# Altium PCB Rackmount_DSP.PcbDoc (part 22 of 24)
Units mil, origin at the board's own origin, x right, y up, seen from the top; angles counter-clockwise.
Board outline 10629.92 x 8267.72 mil, 4 copper layers (Top Layer, Mid Layer 1, Mid Layer 2, Bottom Layer), stack 36.2 mil thick; 4500 components, 1565 nets, 9765 pads, 3289 vias.
Unrouted connection lines stored in the file: 1.
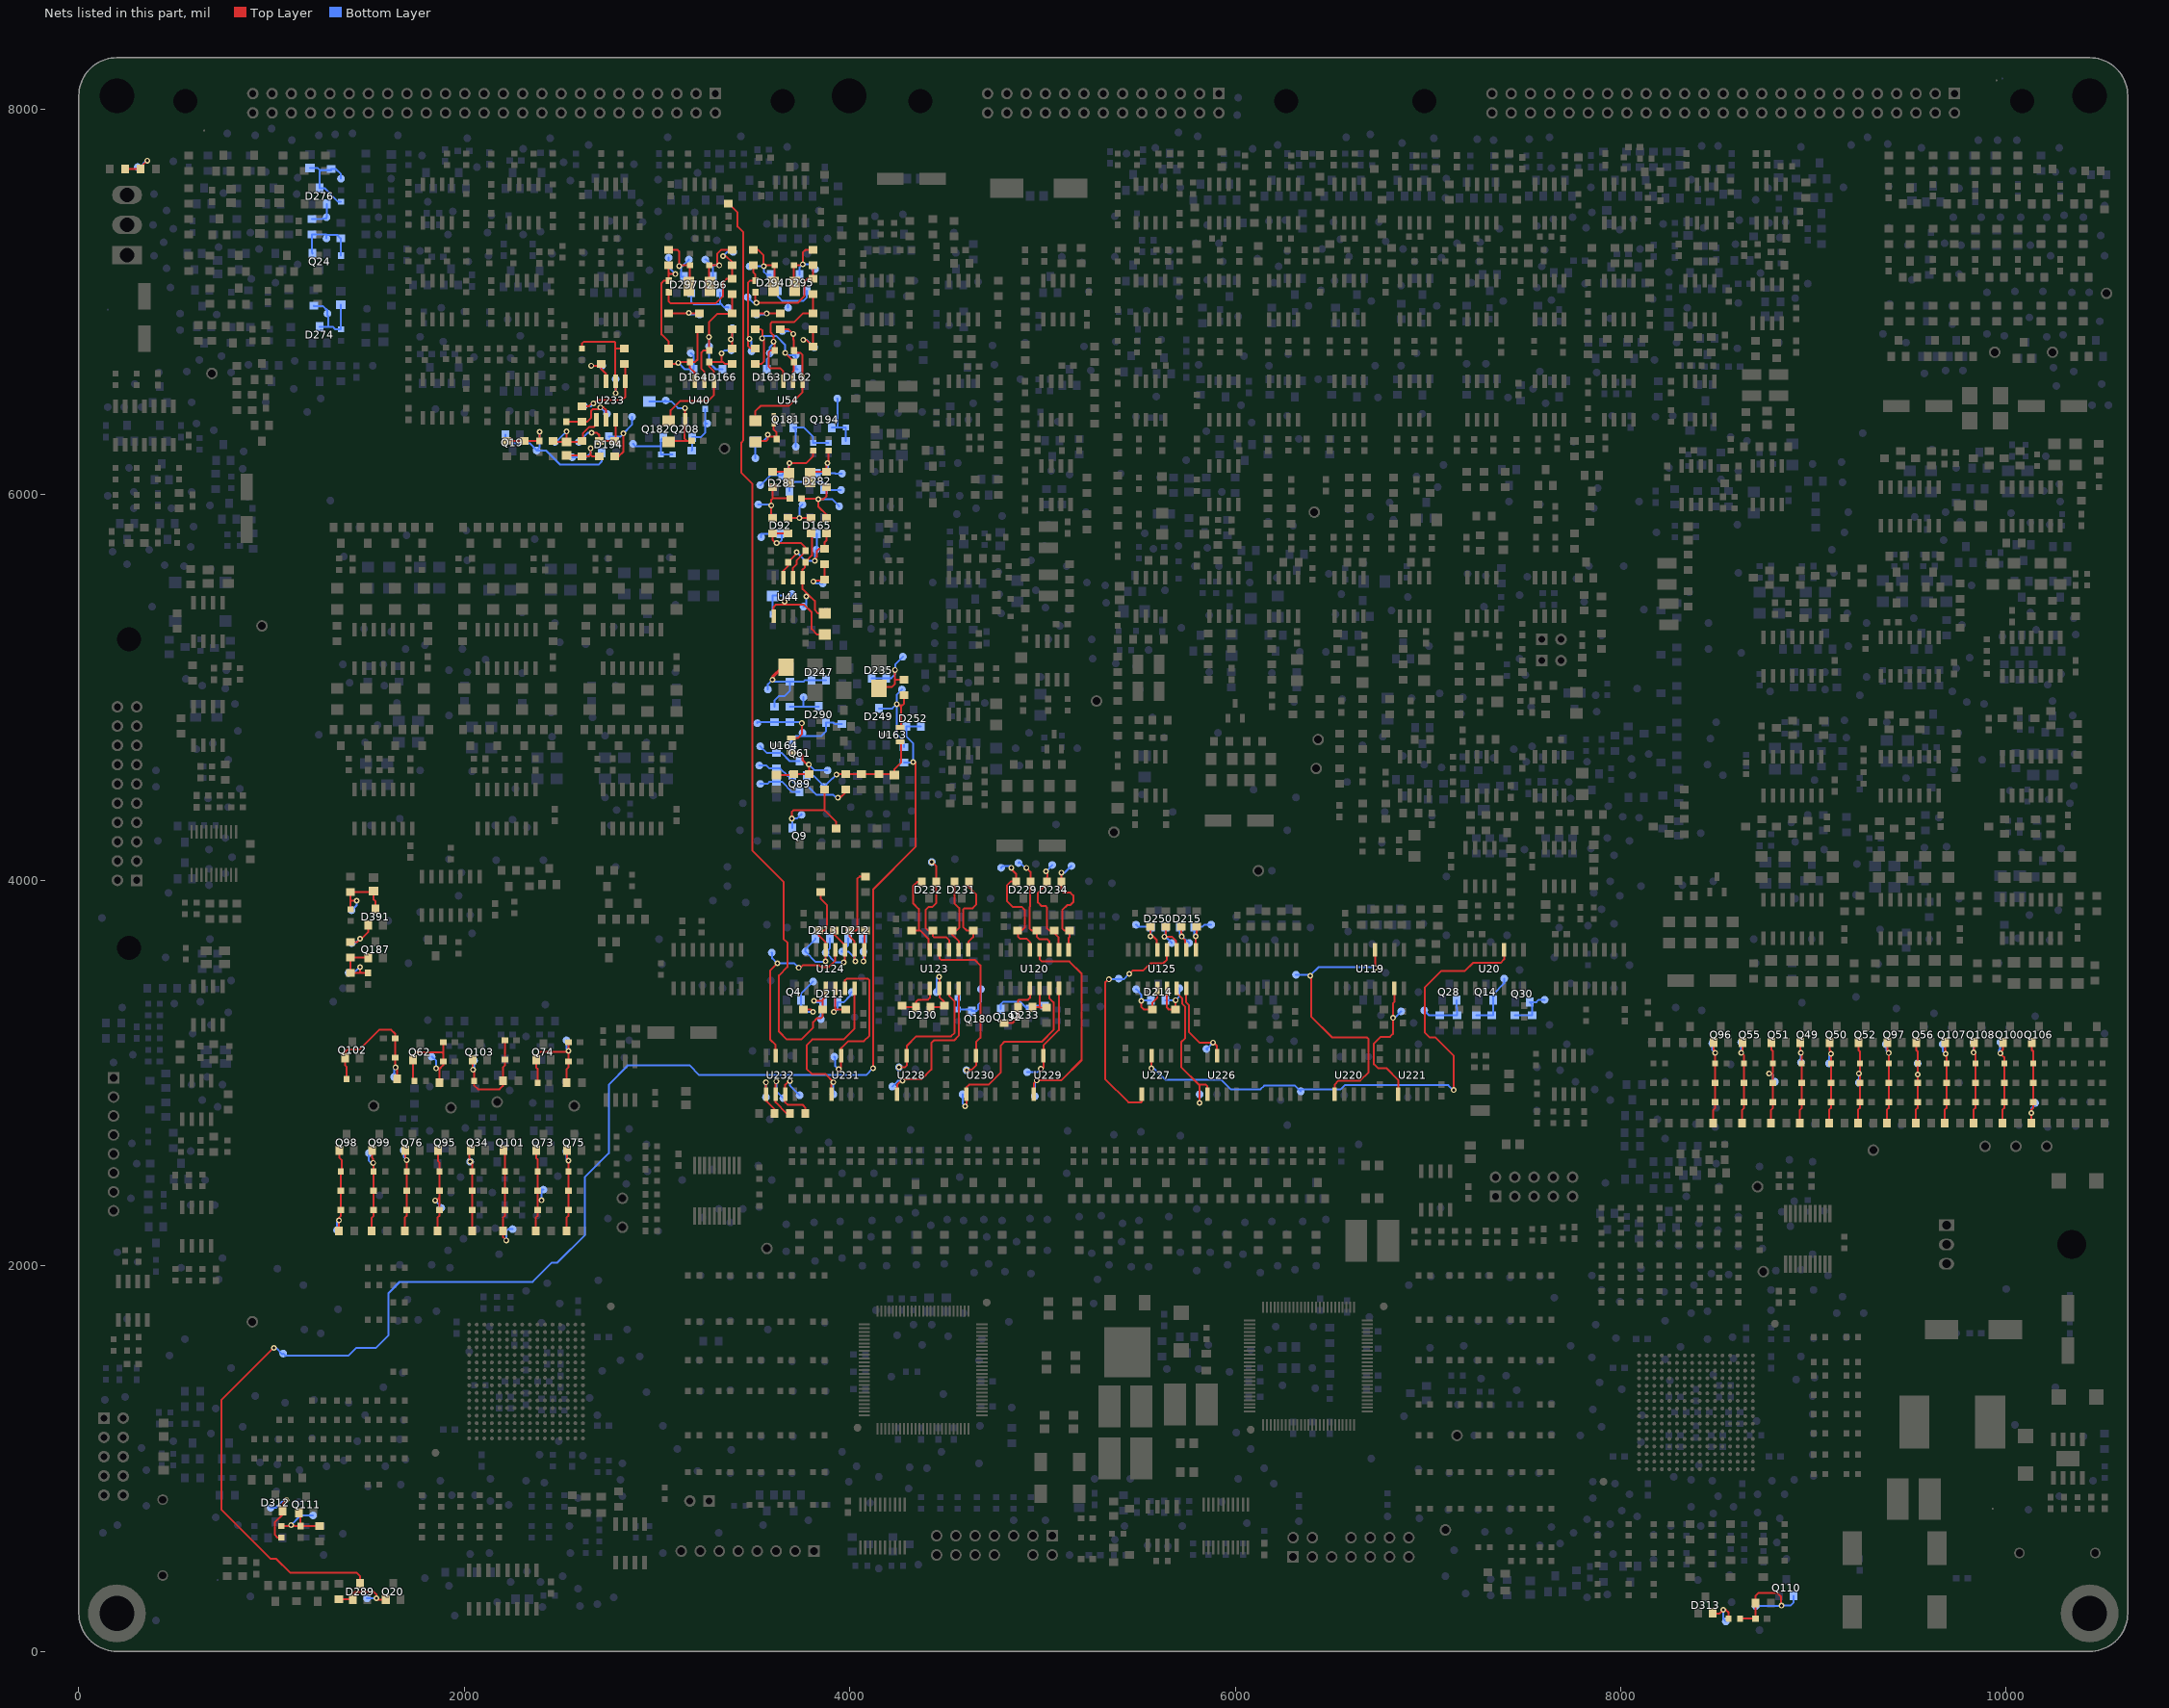
[diagram p24: the nets of this part, all layers, seen from the top]

## Via types
v1: diameter 30, hole 16, Top Layer to Bottom Layer, 3143 vias
v2: diameter 22, hole 12, Top Layer to Bottom Layer, 146 vias

## Nets (pads, with @x,y where several pads share a name; then routed paths per layer and width w, separated by ;. In a path a pad name is that pad's centre, name@x,y a point inside that pad or via, vN(x,y) a via of type N, cw(c..) or ccw(c..) an arc to the next point about the centre after c; other vN are vias at no path point) (continued)
XSIG290101: C820.1 D274.3 R1168.2 R2109.2 TP194.1 | length 407.7
  Bottom Layer w10: R1168.2@1220,6980 1220,6978.12 1267.37,6978.12 1289.15,6956.33 1289.15,6940 TP194.1@1290,6940 1290,6931.11 1295.27,6925.84 1295.27,6871.5 ; D274.3@1250,6871.5 1295.27,6871.5 ; C820.1@1360,6985 R2109.2@1360,6860 1329,6860 1317.5,6871.5 1295.27,6871.5
XSIG290105: C420.2 Q24.1 R1238.1 R1376.1 TP193.1 | length 369.4
  Bottom Layer w10: Q24.1@1212.5,7251.5 1212.5,7255 1208.39,7259.11 1208.39,7350 R1238.1@1210,7350 1285,7350 TP193.1@1285,7348.25 ; TP193.1@1285,7330 TP193.1@1285,7348.25 ; C420.2@1360,7240 R1376.1@1360,7330 1357.5,7330 1339.25,7348.25 TP193.1@1285,7348.25
XSIG290110: D276.1 R1238.2 TP1374.1 | length 153.1
  Bottom Layer w10: R1238.2@1210,7430 1261.52,7430 1264.02,7432.5 1285,7432.5 TP1374.1@1285,7440 1287.5,7442.5 D276.1@1287.5,7508.5
XSIG290111: C821.1 D276.3 R1169.2 R2110.2 TP192.1 | length 440.7
  Bottom Layer w10: C821.1@1200,7695 1200,7694.49 1240,7694.49 1250,7684.49 1257.07,7684.49 1257.07,7684.19 ; R2110.2@1360,7520 1345.47,7520 1273.97,7591.5 D276.3@1250,7591.5 1250,7676.97 1257.07,7684.04 1257.07,7684.19 ; TP192.1@1360,7640 1360,7663.94 1333.94,7690 R1169.2@1310,7690 1310,7684.19 1257.07,7684.19
XSIG290156: TP1375.1 U119.15 U221.5 | length 756.6
  Top Layer w10: U119.15@6825,3440 6825,3368.92 6817.74,3361.66 v1(6817.74,3286.25) 6817.74,3203.56 6802.93,3188.75 6754.04,3188.75 6719,3153.71 6719,3046.29 6739.81,3025.47 6783.54,3025.47 6845,2964.01 U221.5@6845,2890
  Bottom Layer w10: v1(6817.74,3286.25) 6826.25,3286.25 TP1375.1@6860,3320
XSIG290160: TP189.1 U119.4 U220.5 | length 1519.7
  Top Layer w10: v1(6388.69,3505.02) 6392.89,3505.02 6392.89,3293.72 6501.6,3185.02 6682.76,3185.02 6691.5,3176.28 6691.5,3004.17 6647.84,2960.51 6535.51,2960.51 6515,2940 U220.5@6515,2890 ; U119.4@6725,3640 6725,3575.59 6725.09,3575.5 v1(6725.09,3545.5)
  Bottom Layer w10: TP189.1@6315,3510 6388.69,3510 v1(6388.69,3505.02) 6433.87,3550.2 6722.89,3550.2 6725.09,3548 v1(6725.09,3545.5)
XSIG290170: C1119.2 Q187.1 R2545.1 R2554.1 TP1837.1 | length 365.9
  Top Layer w10: v1(1458.78,3550.26) 1458.78,3525.26 1461.61,3522.43 1461.61,3520 ; C1119.2@1500,3520 1461.61,3520 ; Q187.1@1502.5,3598.5 1500.65,3598.5 1499.15,3600 R2545.1@1410,3600 R2554.1@1410,3520 1461.61,3520
  Bottom Layer w10: TP1837.1@1400,3520 1428.51,3520 v1(1458.78,3550.26)
XSIG290175: D391.1 R2545.2 TP1836.1 | length 205.2
  Top Layer w10: R2545.2@1410,3680 1410,3679.31 1442.4,3679.31 1459.01,3695.92 v1(1459.01,3697.7) 1466.82,3697.7 1502.5,3733.38 D391.1@1502.5,3768.5
  Bottom Layer w10: TP1836.1@1415,3675 1436.3,3675 v1(1459.01,3697.7)
XSIG290176: C1137.1 D391.3 R2534.2 R2540.2 TP1835.1 | length 401.6
  Top Layer w10: R2534.2@1410,3850 1410,3897.98 ; v1(1441.87,3894.53) 1413.44,3894.53 1410,3897.98 ; C1137.1@1530,3945 C1137.1@1530,3940 ; D391.3@1540,3851.5 1540,3890 1530,3900 C1137.1@1530,3940 ; 1410,3897.98 R2540.2@1410,3940 C1137.1@1530,3940
  Bottom Layer w10: TP1835.1@1415,3845 1441.87,3871.87 v1(1441.87,3894.53)
XSIG300001: D250.1 R1161.2 TP1376.1 U125.3 | length 275.3
  Top Layer w10: v1(5632.2,3707.77) v1@5640,3707.77 ; R1161.2@5640,3760 v1@5640,3707.77 ; U125.3@5695,3640 5691.71,3640 5691.71,3687.71 5671.65,3707.77 v1@5640,3707.77
  Bottom Layer w10: D250.1@5637.5,3758.5 5637.5,3720 5632.2,3714.7 v1(5632.2,3707.77) 5637.23,3707.77 TP1376.1@5670,3675
XSIG300002: D250.2 R1157.2 TP1377.1 U125.5 | length 275.2
  Top Layer w10: R1157.2@5560,3760 v1(5560,3709.9) 5572.32,3709.9 5592.21,3690 5592.21,3640 U125.5@5595,3640
  Bottom Layer w10: TP1377.1@5485,3770 5496.5,3758.5 D250.2@5562.5,3758.5 5562.5,3720 5560,3717.5 v1(5560,3709.9)
XSIG300003: D215.1 R1222.2 TP1378.1 U125.1 | length 266.8
  Top Layer w10: U125.1@5795,3640 v1(5795,3709.19) 5795,3720 5800,3725 R1222.2@5800,3760
  Bottom Layer w10: v1(5795,3709.19) 5787.5,3716.69 D215.1@5787.5,3758.5 5828.5,3758.5 5840,3770 TP1378.1@5875,3770
XSIG300004: D215.2 R1172.2 TP1379.1 U125.2 | length 240.2
  Top Layer w10: R1172.2@5720,3760 5720,3725 5721.71,3723.29 v1(5721.71,3708.48) 5738.5,3691.69 5738.5,3640 U125.2@5745,3640
  Bottom Layer w10: D215.2@5712.5,3758.5 5712.5,3717.69 v1(5721.71,3708.48) 5726.52,3708.48 TP1379.1@5760,3675
XSIG300005: D214.1 R1221.2 TP1380.1 U125.13 | length 320.7
  Top Layer w10: U125.13@5645,3440 5645,3339.74 5654.74,3330 R1221.2@5690,3330 5690,3377.83 v1(5690.62,3378.45)
  Bottom Layer w10: D214.1@5637.5,3378.5 v1(5690.62,3378.45) v1(5690.62,3378.45) 5710,3397.83 TP1380.1@5710,3440
XSIG300006: D214.2 R1171.2 TP1381.1 U125.12 | length 338.6
  Top Layer w10: v1(5511.65,3374.2) 5511.65,3344.2 5525.85,3330 R1171.2@5570,3330 5570,3365 5595,3390 U125.12@5595,3440
  Bottom Layer w10: TP1381.1@5485,3435 5511.65,3408.35 v1@5511.65,3381.64 ; v1(5511.65,3374.2) v1@5511.65,3381.64 ; D214.2@5562.5,3378.5 5514.79,3378.5 v1@5511.65,3381.64
XSIG300016: TP182.1 U125.4 U227.5 | length 1206.1
  Top Layer w10: v1(5344.17,3486.07) 5340.82,3486.07 5324.37,3469.62 5324.37,2969.86 5446.07,2848.16 5511.45,2848.16 5515,2851.71 U227.5@5515,2890 ; v1(5449.32,3514.92) 5466.4,3532 5521.93,3532 5560.2,3570.27 5627.19,3570.27 5645,3588.08 U125.4@5645,3640
  Bottom Layer w10: v1(5344.17,3486.07) TP182.1@5395,3486.07 ; TP182.1@5395,3490 TP182.1@5395,3486.07 ; v1(5449.32,3514.92) 5420.47,3486.07 TP182.1@5395,3486.07
XSIG300037: TP181.1 U20.3 U227.3 | length 2863.4
  Top Layer w10: v1(5565,3024.15) U227.3@5565,3090 ; v1(7132.75,2911.95) 7132.75,3090.91 7039.32,3184.33 7008.68,3184.33 6982.25,3210.76 6982.25,3442.87 7069.39,3530 7191.63,3530 7233.04,3571.41 7376.41,3571.41 7395,3590 U20.3@7395,3640
  Bottom Layer w10: v1(5565,3024.15) 5577.29,3024.15 5637.38,2964.07 5927.47,2964.07 5976.07,2915.48 6130.84,2915.48 6150.36,2935 6310,2935 TP181.1@6340,2905 6340,2914.17 6544.67,2914.17 6567.89,2937.39 7104.73,2937.39 7130.17,2911.95 v1(7132.75,2911.95)
XSIG300042: D232.1 R1204.2 TP1925.1 U123.3 | length 606.2
  Top Layer w10: v1(4425,4095) 4425.61,4095 4425.61,4097.18 4447.5,4075.28 D232.1@4447.5,3991.5 4447.5,3881.29 4428.71,3862.5 4408.79,3862.5 4392.5,3846.21 4392.5,3752.21 4404.71,3740 R1204.2@4430,3740 4430,3711.5 4436.52,3704.98 4500.02,3704.98 4515,3690 U123.3@4515,3640
XSIG300044: D232.2 R1205.2 U123.5 | length 463.8
  Top Layer w10: R1205.2@4320,3740 4357.5,3740 ; D232.2@4372.5,3991.5 4348.89,3991.5 4329.33,3971.94 4329.33,3879.24 4357.5,3851.07 4357.5,3740 ; U123.5@4415,3640 4408.5,3640 4408.5,3695.48 4363.98,3740 4357.5,3740
XSIG300046: D231.1 R1202.2 U123.1 | length 473.1
  Top Layer w10: U123.1@4615,3640 4615,3680.2 4639.8,3705 4640,3705 R1202.2@4640,3740 4605.64,3740 4587.83,3757.81 4587.83,3847.97 4594.9,3855.04 4636.94,3855.04 4656.65,3874.76 4656.65,3925.97 4617.5,3965.12 D231.1@4617.5,3991.5
XSIG300048: D231.2 R1203.2 U123.2 | length 410.1
  Top Layer w10: D231.2@4542.5,3991.5 4542.5,3880.81 4567.5,3855.81 4567.5,3753.39 4554.11,3740 R1203.2@4530,3740 4528.36,3740 4528.36,3721.1 4566.24,3683.23 4566.23,3640 U123.2@4565,3640
XSIG300050: D230.1 R1200.2 TP1666.1 U123.13 | length 348
  Top Layer w10: D230.1@4417.5,3341.5 4467.73,3341.5 4476.23,3350 R1200.2@4488.35,3350 ; v1(4463.61,3500.22) 4465,3500.22 U123.13@4465,3440 4465,3393.82 4488.35,3370.46 R1200.2@4488.35,3350 ; R1200.2@4490,3350 R1200.2@4488.35,3350
  Bottom Layer w10: TP1666.1@4450,3420 4450,3493.81 4466.66,3510.47 4466.66,3500.22 v1(4463.61,3500.22)
XSIG300052: D230.2 R1201.2 U123.12 | length 239.5
  Top Layer w10: R1201.2@4270,3350 4270,3341.5 D230.2@4342.5,3341.5 4342.5,3368.73 4353.77,3380 4405,3380 4415,3390 U123.12@4415,3440
XSIG300066: TP1388.1 U123.15 U228.5 | length 868.5
  Top Layer w10: U228.5@4245,2890 4245,2940 4264.69,2959.69 v1(4273.48,2959.69) 4276.5,2959.69 4285.29,2968.48 4373.56,2968.48 4423.05,3017.97 4423.05,3156.45 4436.62,3170.02 4541.25,3170.02 4565.22,3193.99 4565.22,3440 U123.15@4565,3440
  Bottom Layer w10: TP1388.1@4220,2930 4249.69,2959.69 v1(4273.48,2959.69)
XSIG300071: Q4.1 R1272.2 TP1389.1 | length 280.3
  Top Layer w10: R1272.2@3760,3330 3797.5,3330 3808.78,3318.72 v1(3808.78,3317.07)
  Bottom Layer w10: v1(3808.78,3317.07) 3781.48,3317.07 3747.5,3351.04 Q4.1@3747.5,3378.5 3747.5,3412.5 TP1389.1@3810,3475
XSIG300078: TP1390.1 U123.4 U230.3 | length 860.2
  Top Layer w10: U123.4@4465,3640 4465,3595.71 4472.76,3587.95 4648.06,3587.95 4677.3,3558.7 4677.3,3182.72 4655,3160.42 U230.3@4655,3090 4655,3040 4631.44,3016.44 4606.44,3016.44 v1(4605,3015)
XSIG300089: TP1391.1 U123.14 U228.3 | length 664.6
  Top Layer w10: v1(4255,3030) 4285,3030 4295,3040 U228.3@4295,3090 4295,3140 4345.23,3190.23 4524.86,3190.23 4544.16,3209.53 4544.16,3371.13 4515,3400.28 U123.14@4515,3440
XSIG300090: D229.1 R1189.2 TP1791.1 U120.3 | length 574.7
  Top Layer w10: v1(4916.48,4064.87) 4937.5,4043.85 D229.1@4937.5,3991.5 4935.88,3991.5 4935.88,3864.63 4932.5,3861.25 4932.5,3750.32 4942.82,3740 R1189.2@4970,3740 4970,3707.68 4982.16,3695.52 5022.93,3695.52 5035,3683.45 U120.3@5035,3640
  Bottom Layer w10: TP1791.1@4875,4090 4879.75,4094.75 4909.63,4064.87 v1(4916.48,4064.87)
XSIG300092: D229.2 R1190.2 TP1664.1 U120.5 | length 679.8
  Top Layer w10: v1(4837.54,4064.87) 4837.54,4059.27 4862.5,4034.31 D229.2@4862.5,3994.68 ; D229.2@4862.5,3991.5 D229.2@4862.5,3994.68 ; R1190.2@4870,3740 R1190.2@4872.5,3740 ; U120.5@4935,3640 4935,3680.09 4918.61,3696.49 4884.58,3696.49 4872.5,3708.57 R1190.2@4872.5,3740 ; D229.2@4862.5,3994.68 4835.9,3994.68 4816.38,3975.16 4816.38,3891.35 4845.22,3862.5 4891.3,3862.5 4908.01,3845.79 4908.01,3755.23 4892.78,3740 R1190.2@4872.5,3740
  Bottom Layer w10: TP1664.1@4785,4065 4795,4075 4837.54,4075 v1(4837.54,4064.87)
XSIG300094: D234.1 R1208.2 TP1663.1 U120.1 | length 581.3
  Top Layer w10: v1(5097.55,4040.21) D234.1@5097.5,3991.5 D234.1@5097.5,3991.5 5097.5,3946.55 5107.88,3936.18 5144.63,3936.18 5159.5,3921.31 5159.5,3886.81 5144.51,3871.82 5128.11,3871.82 5102.5,3846.21 5102.5,3749.92 5112.42,3740 R1208.2@5140,3740 5140,3705 5135,3700 U120.1@5135,3640
  Bottom Layer w10: v1(5097.55,4040.21) 5115.21,4040.21 TP1663.1@5150,4075
XSIG300096: D234.2 R1209.2 TP1662.1 U120.2 | length 550.1
  Top Layer w10: v1(5017.98,4046.23) 5017.98,4041.67 5024.5,4035.15 5024.5,4017.56 5022.5,4015.56 D234.2@5022.5,3991.5 5022.5,3981.72 4975.88,3935.1 4975.88,3884.5 4993.46,3866.93 5015.43,3866.93 5022.5,3859.86 5022.5,3751.8 5034.3,3740 R1209.2@5060,3740 5060,3727.78 5083.59,3704.19 5083.59,3640 U120.2@5085,3640
  Bottom Layer w10: v1(5017.98,4046.23) 5049.87,4078.12 5050,4078.12 TP1662.1@5050,4080
XSIG300098: D233.1 R1206.2 U120.13 | length 171.6
  Top Layer w10: D233.1@4947.5,3341.5 4985,3341.5 ; U120.13@4985,3440 4985,3341.5 ; R1206.2@5020,3340 4986.5,3340 4985,3341.5
XSIG300100: D233.2 R1207.2 U120.12 | length 290.7
  Top Layer w10: R1207.2@4800,3260 4845.06,3260 4872.5,3287.44 D233.2@4872.5,3341.5 4872.5,3376.03 4876.47,3380 4925,3380 4935,3390 U120.12@4935,3440
XSIG300116: TP1398.1 U120.4 U229.5 | length 1186.6
  Top Layer w10: U229.5@4955,2890 4955,2947.07 v1(4969.48,2961.56) 5096.69,2961.56 5202.73,3067.6 5202.73,3515.37 5139.03,3579.06 4995.94,3579.06 4985,3590 U120.4@4985,3640
  Bottom Layer w10: TP1398.1@4960,2880 4960,2952.07 v1(4969.48,2961.56)
XSIG300127: D213.1 R1115.2 TP1654.1 U124.3 | length 391.2
  Top Layer w10: R1115.2@3920,3740 3920,3717.27 3975,3662.27 U124.3@3975,3640 3975,3580.3 3968.77,3574.07 v1(3967.99,3574.84)
  Bottom Layer w10: D213.1@3897.5,3698.5 3897.5,3647.5 TP1654.1@3875,3625 3925.93,3574.07 3968.77,3574.07 v1(3967.99,3574.84)
XSIG300129: D213.2 R1220.2 R3008.2 TP1653.1 U124.5 | length 644
  Top Layer w10: R1220.2@3850,3940 3850,3903.91 3882.45,3871.46 3882.45,3753.26 3869.18,3740 R3008.2@3840,3740 3840,3713.17 3875,3678.17 U124.5@3875,3640 3875,3581.12 v1(3873.8,3579.92)
  Bottom Layer w10: D213.2@3822.5,3698.5 3822.5,3695 3770,3642.5 TP1653.1@3770,3630 3823.14,3576.86 3875,3576.86 3875,3578.72 v1(3873.8,3579.92)
XSIG300131: D212.1 R1114.2 TP1652.1 U124.1 | length 288.2
  Top Layer w10: v1(4070.08,3579.22) 4075,3584.14 U124.1@4075,3640 4075,3740 R1114.2@4080,3740
  Bottom Layer w10: D212.1@4067.5,3698.5 4070,3696 TP1652.1@4070,3630 4070,3579.3 v1(4070.08,3579.22)
XSIG300133: D212.2 R1219.2 R3007.2 TP1651.1 U124.2 | length 708.8
  Top Layer w10: v1(4029.26,3579.19) 4025,3579.19 U124.2@4025,3640 4025,3684.17 4000,3709.17 R3007.2@4000,3740 4032.94,3740 4037.8,3744.86 4037.8,4007.09 4051.48,4020.77 4052.25,4020 R1219.2@4080,4020
  Bottom Layer w10: D212.2@3992.5,3698.5 3992.5,3664.65 3960,3632.15 TP1651.1@3960,3630 3992.38,3630 3992.5,3630.12 4025,3597.62 4025,3579.19 v1(4029.26,3579.19)
XSIG300135: D211.1 R1113.2 TP1403.1 U124.13 | length 346.1
  Top Layer w10: v1(3917.5,3317.73) 3929.77,3330 ; U124.13@3925,3440 3925,3330 3929.77,3330 ; R1113.2@3980,3330 3929.77,3330
  Bottom Layer w10: v1(3917.5,3317.73) 3925.23,3317.73 3937.5,3330 D211.1@3937.5,3368.5 3969.35,3368.5 4001.39,3400.53 4001.39,3411.39 TP1403.1@4010,3420
XSIG300151: TP1405.1 U124.15 U231.5 | length 914.6
  Top Layer w10: U231.5@3905,2890 3905,2942.68 v1(3915,2952.68) 3872.14,2995.53 3801.82,2995.53 3775.38,3021.97 3775.38,3144.47 3804.97,3174.06 3967.77,3174.06 4025,3231.29 U124.15@4025,3440
  Bottom Layer w10: TP1405.1@3915,2890 v1(3915,2952.68)
XSIG300161: TP1406.1 U124.14 U231.3 | length 828.3
  Top Layer w10: v1(3942.59,3019.89) 3955,3032.3 U231.3@3955,3090 3955,3128.9 3991.49,3165.4 4073.3,3165.4 4101.5,3193.59 4101.5,3481.21 4092.71,3490 3983.98,3490 3975,3481.02 U124.14@3975,3440
  Bottom Layer w10: TP1406.1@3920,3085 3920,3083.43 3924.52,3083.43 3924.52,3035.87 3940.5,3019.89 v1(3942.59,3019.89)
XSIG300162: Q14.1 R1225.2 R1690.1 TP1407.1 | length 302.4
  Bottom Layer w10: R1690.1@7250,3300 R1225.2@7330,3300 7337.5,3300 Q14.1@7337.5,3378.5 7337.5,3397 7339.33,3397 7339.33,3409.3 7395,3464.98 TP1407.1@7395,3490
XSIG300173: TP184.1 U124.4 U232.3 | length 966.2
  Top Layer w10: U232.3@3615,3090 3615,3146.65 3586.56,3175.08 3586.56,3532.01 v1(3623.91,3569.36) ; v1(3735.28,3546.21) 3743.65,3546.21 3757.4,3559.96 3840.21,3559.96 3850.26,3549.92 3890.49,3549.92 3925,3584.43 U124.4@3925,3640
  Bottom Layer w10: TP184.1@3595,3625 3597.67,3625 3597.67,3595.6 v1(3623.91,3569.36) 3712.14,3569.36 v1(3735.28,3546.21)
XSIG300174: Q30.1 R1226.2 R1691.1 TP1408.1 | length 245.9
  Bottom Layer w10: R1691.1@7450,3300 R1226.2@7540,3300 7540,3356 Q30.1@7527.5,3368.5 7562.5,3368.5 7574,3380 TP1408.1@7605,3380
XSIG300180: Q28.1 R1227.2 R1692.1 TP1409.1 | length 259.9
  Bottom Layer w10: TP1409.1@6980,3325 7005,3300 R1692.1@7060,3300 R1227.2@7150,3300 7150,3337.5 7147.5,3340 Q28.1@7147.5,3378.5
XSIG300238: TP1410.1 U125.14 U226.5 | length 798.5
  Top Layer w10: U125.14@5695,3440 5695,3416.5 5725,3386.5 5725,3358.71 5740.42,3343.3 5740.42,3181.56 5719,3160.14 5719,3031.77 5809.44,2941.33 ; v1(5815,2845) 5815,2935.77 5809.44,2941.33 ; U226.5@5855,2890 5855,2931.3 5844.97,2941.33 5809.44,2941.33
  Bottom Layer w10: v1(5815,2845) TP1410.1@5815,2890
XSIG300241: TP1411.1 U125.15 U226.3 | length 516.6
  Top Layer w10: U125.15@5745,3440 5745,3367 5760.62,3351.37 5760.62,3211.5 5813.76,3158.36 v1(5884.34,3158.37) 5886.63,3158.37 5905,3140 U226.3@5905,3090
  Bottom Layer w10: TP1411.1@5850,3125 5855,3120 5855,3129.03 v1(5884.34,3158.37)
XSIG300256: TP1412.1 U120.14 U230.5 | length 1051.7
  Top Layer w10: v1(4598.52,2827.74) 4605,2834.22 U230.5@4605,2890 4605,2926.08 4618.92,2940 4718.96,2940 4783.59,3004.63 4783.59,3143.8 4802.29,3162.5 4996.21,3162.5 5057.5,3223.79 5057.5,3366.21 5035,3388.71 U120.14@5035,3440
  Bottom Layer w10: TP1412.1@4585,2890 4585,2841.26 v1(4598.52,2827.74)
XSIG300259: TP1413.1 U120.15 U229.3 | length 539.1
  Top Layer w10: v1(4991.22,3021.56) 4997.67,3021.56 5005,3028.89 U229.3@5005,3090 5005,3143 5085,3223 U120.15@5085,3440
  Bottom Layer w10: TP1413.1@4920,3005 4974.66,3005 v1(4991.22,3021.56)
XSIG300269: R2509.2 TP1414.1 U232.5 | length 256.9
  Top Layer w10: v1(3565,2951.65) U232.5@3565,2890 3565,2856.12 3610,2811.12 R2509.2@3610,2790
  Bottom Layer w10: TP1414.1@3565,2875 v1(3565,2951.65)
XSIG300270: R2508.1 TP1415.1 U232.6 | length 310.3
  Top Layer w10: v1(3618.44,2956.55) 3615,2953.11 U232.6@3615,2890 3615,2848.71 3673.71,2790 R2508.1@3690,2790
  Bottom Layer w10: v1(3618.44,2956.55) 3618.44,2906.56 TP1415.1@3655,2870
XSIG300271: R2508.2 TP1416.1 U232.7 | length 364.6
  Top Layer w10: v1(3688.49,2958.52) 3683.52,2958.52 3665,2940 U232.7@3665,2890 3665,2847.48 3676.92,2835.56 3753.98,2835.56 3770,2819.54 R2508.2@3770,2790
  Bottom Layer w10: v1(3688.49,2958.52) 3688.49,2936.51 TP1416.1@3740,2885
XSIG300285: D211.2 R1218.2 R3006.2 TP1404.1 U124.12 | length 5104.2
  Top Layer w10: R3006.2@3370,7510 3372.5,7510 3417.49,7465.01 3417.49,7391.66 3448.09,7361.06 3448.09,6282.04 3437.68,6271.62 3437.68,6113.35 3494.89,6056.13 3494.89,4153.64 3656.13,3992.41 3656.13,3696.77 3675.47,3677.43 3675.47,3550.2 3631.87,3506.6 3631.87,3214.95 3672.1,3174.72 3748.43,3174.72 3810,3236.29 3810,3263.71 3831.29,3285 3850,3285 3860,3295 R1218.2@3860,3330 3860,3375.83 ; v1(3813.7,3374.93) 3814.6,3375.83 3860,3375.83 ; U124.12@3875,3440 3875,3398.26 3875.89,3397.37 3860,3381.49 3860,3375.83
  Bottom Layer w10: v1(3813.7,3374.93) 3820.13,3368.5 D211.2@3862.5,3368.5 3862.5,3328.75 3850,3316.25 TP1404.1@3850,3280
XSIG310012: C553.2 R1629.2 R1847.2 TP1417.1 U44.1 | length 576.8
  Top Layer w10: v1(3774.73,5472.71) v1@3784.02,5481.99 ; R1629.2@3800,5800 3800,5787.68 3803.74,5783.94 3803.74,5685.32 3770,5651.58 C553.2@3770,5650 3770,5648.5 3767.06,5645.56 3767.06,5624.55 3755,5612.49 U44.1@3755,5570 3755,5511.01 v1@3784.02,5481.99 ; R1847.2@3870,5385 3836,5385 3817.94,5403.06 3817.94,5449.03 3816.98,5449.03 v1@3784.02,5481.99
  Bottom Layer w10: TP1417.1@3760,5420 3774.73,5434.73 v1(3774.73,5472.71)
XSIG310014: C422.2 R1843.1 R1847.1 TP1418.1 U44.5 | length 693.5
  Top Layer w10: U44.5@3605,5370 3605,5420 3615,5430 3664.86,5430 ; v1(3661.17,5446.47) 3664.86,5442.78 3664.86,5430 ; R1847.1@3870,5275 3831.12,5275 3802.5,5303.62 3802.5,5390.21 3762.71,5430 3664.86,5430
  Bottom Layer w10: C422.2@3600,5380 R1843.1@3600,5475 3600,5477.98 3654.25,5477.98 3661.17,5471.05 v1(3661.17,5446.47) 3661.38,5446.47 3699.92,5485 TP1418.1@3700,5485
XSIG310019: C553.1 D92.3 R1642.1 R1819.2 TP1419.1 U44.2 | length 676.2
  Top Layer w10: R1642.1@3680,5800 R1819.2@3600,5800 3600,5765 3615.38,5749.62 v1(3620.43,5749.62) 3639.65,5749.62 3640,5749.27 3747.16,5749.27 3770,5726.44 C553.1@3770,5710 3770,5705.32 3725,5660.32 3725,5640.29 3705,5620.29 U44.2@3705,5570
  Bottom Layer w10: TP1419.1@3540,5780 3540,5798.51 D92.3@3640,5798.5 3647.49,5798.5 3647.49,5766.81 3630.3,5749.62 v1(3620.43,5749.62)
XSIG310021: C542.1 D165.3 R1627.1 R1824.2 TP183.1 U44.3 | length 616
  Top Layer w10: U44.3@3655,5570 3655,5606.2 3680,5631.2 C542.1@3680,5650 3680,5651.5 3724.25,5695.75 v1(3724.25,5702.6) ; v1(3818.21,5657.29) 3818.21,5667.79 3828.72,5678.29 3828.72,5708.79 3839.93,5720 R1627.1@3870,5720 3870,5755 3880,5765 R1824.2@3880,5800
  Bottom Layer w10: v1(3724.25,5702.6) 3769.56,5657.29 v1(3818.21,5657.29) 3818.21,5697.75 TP183.1@3825,5704.54 ; TP183.1@3830,5709.54 TP183.1@3825,5704.54 ; D165.3@3830,5798.5 3830,5715 TP183.1@3825,5715 TP183.1@3825,5704.54
XSIG310023: R1627.2 R1628.1 TP1420.1 | length 203.1
  Top Layer w10: v1(3810.48,5550.07) 3810.48,5555.59 3870,5555.59 R1628.1@3870,5560 R1627.2@3870,5640
  Bottom Layer w10: v1(3810.48,5550.07) 3814.93,5550.07 3825,5540 TP1420.1@3860,5540
XSIG310024: R1629.1 R1642.2 TP1421.1 | length 197
  Top Layer w10: R1642.2@3680,5880 v1(3738.14,5880) R1629.1@3800,5880
  Bottom Layer w10: v1(3738.14,5880) 3738.14,5933.14 TP1421.1@3755,5950
XSIG310025: C523.1 R1644.2 R1819.1 TP1422.1 | length 335
  Top Layer w10: R1819.1@3600,5880 3592.65,5880 v1(3592.65,5945) 3592.4,5945 3592.4,5974.01 3599.98,5981.58 ; R1644.2@3600,6040 3600,5981.58 ; C523.1@3690,5980 3690,5981.58 3600,5981.58
  Bottom Layer w10: TP1422.1@3525,5950 3592.65,5950 v1(3592.65,5945)
XSIG310026: C523.2 R1636.2 R1824.1 TP1423.1 | length 424.6
  Top Layer w10: C523.2@3750,5980 3836.49,5980 v1(3836.49,5977.89) ; R1824.1@3880,5880 3880,5895.24 3836.49,5938.75 v1(3836.49,5977.89) ; R1636.2@3880,6040 3880,5994.47 3863.43,5977.89 v1(3836.49,5977.89)
  Bottom Layer w10: v1(3836.49,5977.89) 3907.11,5977.89 TP1423.1@3945,5940
XSIG310029: C826.1 D282.3 R761.2 R1636.1 TP1424.1 | length 421.4
  Top Layer w10: C826.1@3795,6090 3795,6120 R1636.1@3880,6120 3880,6165.11 v1(3883.5,6165.11) 3890,6165.11 R761.2@3890,6230
  Bottom Layer w10: D282.3@3830,6111.5 3885.64,6111.5 ; v1(3883.5,6165.11) 3885.64,6165.11 3885.64,6111.5 ; TP1424.1@3960,6110 3925,6110 3923.5,6111.5 3885.64,6111.5
XSIG310039: C554.2 R1637.2 R1841.2 TP1425.1 U54.1 | length 816.7
  Top Layer w10: R1841.2@3510,6385 3510,6434.48 3536.83,6461.31 3683.62,6461.31 3755,6532.69 U54.1@3755,6590 3755,6725.54 3743.04,6737.5 3710,6737.5 C554.2@3710,6750 3710,6801.26 3706.71,6804.55 v1(3706.71,6834.55) 3681.26,6860 R1637.2@3640,6860
  Bottom Layer w10: TP1425.1@3650,6850 3691.26,6850 v1(3706.71,6834.55)
XSIG310041: C355.2 R1841.1 R1848.1 TP1426.1 U54.5 | length 425.8
  Top Layer w10: R1841.1@3510,6275 3510,6278.87 3565.6,6278.87 3573.56,6286.83 v1(3573.56,6312.03) 3583.09,6302.5 C355.2@3620,6302.5 ; U54.5@3605,6390 3605,6337.5 3620,6322.5 C355.2@3620,6302.5 ; C355.2@3620,6290 C355.2@3620,6302.5
  Bottom Layer w10: TP1426.1@3510,6190 R1848.1@3510,6275 3510,6280.42 3552.58,6280.42 3573.56,6301.41 v1(3573.56,6312.03)
XSIG310046: C554.1 D162.3 R1645.1 R1821.2 TP1427.1 U54.2 | length 761.5
  Top Layer w10: R1821.2@3510,6680 3542.78,6680 3554.72,6691.94 3554.72,6804.23 3546.25,6804.23 v1@3546.25,6812.33 ; R1645.1@3510,6860 3538.86,6860 3546.25,6852.61 v1@3546.25,6812.33 ; v1(3545.47,6812.33) v1@3546.25,6812.33 ; v1(3665.31,6737.11) 3665.31,6734.69 C554.1@3710,6690 3710,6645 3705,6640 U54.2@3705,6590
  Bottom Layer w10: v1(3545.47,6812.33) 3545.47,6824.83 3616.92,6824.83 3665.31,6776.44 v1(3665.31,6737.11) 3677.43,6725 TP1427.1@3720,6725 3720,6651.5 D162.3@3730,6651.5
XSIG310049: C524.1 D163.3 R1630.1 R1820.2 TP115.1 U54.3 | length 897.7
  Top Layer w10: v1(3603.77,6794.83) v1@3603.77,6797.87 ; U54.3@3655,6590 3655,6640 3637.5,6657.5 3587.79,6657.5 3579,6666.29 3579,6738.79 3590.21,6750 C524.1@3610,6750 3610,6791.64 v1@3603.77,6797.87 ; R1820.2@3810,7040 R1630.1@3810,6940 3755.77,6940 3710.94,6895.18 3595.07,6895.18 3587.99,6888.1 3587.99,6843.65 3603.77,6827.87 v1@3603.77,6797.87
  Bottom Layer w10: D163.3@3570,6651.5 3570,6704.92 3586.88,6721.8 3585,6723.68 TP115.1@3585,6735 3585,6766.35 3603.77,6785.13 v1(3603.77,6794.83)
XSIG310052: R1630.2 R1631.1 TP1428.1 | length 228.8
  Top Layer w10: v1(3758.22,6804) 3773.5,6804 3807.5,6770 R1631.1@3810,6770 R1630.2@3810,6860
  Bottom Layer w10: v1(3758.22,6804) 3776,6804 TP1428.1@3815,6765
XSIG310053: R1637.1 R1645.2 TP1429.1 | length 185.6
  Top Layer w10: R1645.2@3510,6940 v1(3568.49,6940) R1637.1@3640,6940
  Bottom Layer w10: TP1429.1@3515,6935 3563.49,6935 v1(3568.49,6940)
XSIG310054: C525.1 R1646.2 R1821.1 TP1430.1 | length 577.8
  Top Layer w10: v1(3478.69,6809.63) 3473.04,6815.28 v1@3471.31,6815.28 ; R1646.2@3500,7190 3500,7152.5 3510,7142.5 C525.1@3510,7110 3481.43,7110 3471.31,7099.87 v1@3471.31,6815.28 ; R1821.1@3510,6760 3510,6760.7 3483.04,6760.7 3471.31,6772.43 v1@3471.31,6815.28
  Bottom Layer w10: v1(3478.69,6809.63) 3490,6798.32 TP1430.1@3490,6745
XSIG310055: C525.2 R1638.2 R1820.1 TP1431.1 | length 575.1
  Top Layer w10: C525.2@3510,7050 3510,7001 v1(3515.54,6995.46) 3729.18,6995.46 3765,7031.29 3765,7107.21 3777.79,7120 R1820.1@3810,7120 R1638.2@3810,7190
  Bottom Layer w10: TP1431.1@3470,7025 3499.54,6995.46 v1(3515.54,6995.46)
XSIG310057: C827.2 D294.3 R861.2 R1646.1 TP1432.1 | length 440.7
  Top Layer w10: R1646.1@3500,7270 3525.04,7270 3550.52,7244.52 3550.52,7185.45 v1(3553.15,7185.45) 3557.7,7190 R861.2@3610,7190 3610,7080 C827.2@3605,7080
  Bottom Layer w10: TP1432.1@3480,7185 v1@3553.15,7185 ; v1(3553.15,7185.45) v1@3553.15,7185 ; D294.3@3590,7141.5 3569.87,7141.5 3553.15,7158.23 v1@3553.15,7185
XSIG310070: C555.2 R1639.2 R1842.2 TP1433.1 U40.1 | length 729.6
  Top Layer w10: R1842.2@3060,6385 3070.96,6385 3070.96,6438.46 3120.27,6487.77 3265.7,6487.77 3295,6517.07 U40.1@3295,6590 3295,6640.3 3270,6665.3 C555.2@3270,6690 3334.54,6690 ; v1(3334.54,6734.16) 3334.54,6690 ; R1639.2@3390,6680 3350.93,6680 3340.93,6690 3334.54,6690
  Bottom Layer w10: v1(3334.54,6734.16) 3350.38,6750 TP1433.1@3385,6750
XSIG310072: C356.2 R1842.1 R1849.1 TP1434.1 U40.5 | length 508.8
  Top Layer w10: R1842.1@3060,6275 3069.38,6275 3073.92,6279.54 3154.43,6279.54 3154.43,6280 ; v1(3145.33,6450.2) 3145,6449.87 U40.5@3145,6390 3143.28,6390 3143.28,6291.15 3154.43,6280 ; C356.2@3180,6280 3154.43,6280
  Bottom Layer w10: R1849.1@2960,6485 3040,6485 3040,6490 TP1434.1@3045,6490 3045,6485 3073.61,6485 3108.42,6450.2 v1(3145.33,6450.2)
XSIG310077: C555.1 D166.3 R1658.1 R1823.2 TP114.1 U40.2 | length 804.2
  Top Layer w10: U40.2@3245,6590 3245,6637.96 3229.78,6653.18 3229.78,6738.07 3241.71,6750 C555.1@3270,6750 3270,6818.57 v1(3268.52,6818.57) 3268.52,6895.94 3310.87,6938.28 3388.28,6938.28 R1658.1@3390,6940 R1823.2@3390,7040
  Bottom Layer w10: v1(3268.52,6818.57) 3270,6817.1 TP114.1@3270,6770 3270,6685.9 3304.4,6651.5 D166.3@3340,6651.5
XSIG310079: C526.1 D164.3 R1632.1 R1822.2 TP1435.1 U40.3 | length 624.9
  Top Layer w10: R1822.2@3060,6680 3109.54,6680 v1@3110.27,6680.73 ; v1(3110.27,6684.73) v1@3110.27,6680.73 ; U40.3@3195,6590 3195,6633.88 3170.33,6658.55 C526.1@3170.33,6690 ; R1632.1@3220,6860 3209.47,6860 3209.47,6701.32 3198.15,6690 C526.1@3170.33,6690 ; v1@3110.27,6680.73 3119.54,6690 C526.1@3170,6690 C526.1@3170.33,6690
  Bottom Layer w10: v1(3110.27,6684.73) 3143.5,6651.5 D164.3@3190,6651.5 3190,6720 TP1435.1@3175,6735
XSIG310082: R1632.2 R1633.1 TP1436.1 | length 223.3
  Top Layer w10: R1633.1@3060,6940 3164.47,6940 v1(3164.47,6943.09) 3167.56,6940 R1632.2@3220,6940
  Bottom Layer w10: v1(3164.47,6943.09) 3172.56,6935 TP1436.1@3220,6935
XSIG310083: R1639.1 R1658.2 TP1437.1 | length 169.6
  Top Layer w10: v1(3382.71,6805.75) v1@3390,6805.75 ; R1639.1@3390,6760 v1@3390,6805.75 ; R1658.2@3390,6860 v1@3390,6805.75
  Bottom Layer w10: v1(3382.71,6805.75) 3390,6813.04 TP1437.1@3390,6865
XSIG310084: C527.1 R1641.2 R1823.1 TP1438.1 | length 685.6
  Top Layer w10: C527.1@3060,7050 3060,7002.92 3068.75,6994.17 3305.73,6994.17 3343.2,7031.64 3343.2,7103.41 3359.78,7120 R1823.1@3390,7120 R1641.2@3390,7190 3390,7206.26 3358.11,7238.15 v1(3341.39,7238.15)
  Bottom Layer w10: v1(3341.39,7238.15) 3363.24,7260 TP1438.1@3395,7260
XSIG310086: C527.2 R1640.2 R1822.1 TP1439.1 | length 613.6
  Top Layer w10: R1822.1@3060,6760 3060,6794.16 3022.5,6831.66 3022.5,7098.49 3034.01,7110 C527.2@3060,7110 3060,7145.03 3066.93,7145.03 ; R1640.2@3060,7190 3060,7151.96 3066.93,7145.03 ; v1(3095,7145.03) 3066.93,7145.03
  Bottom Layer w10: TP1439.1@3060,7230 3060,7180.03 v1(3095,7145.03)
XSIG310088: C828.1 D297.3 R763.2 R1640.1 TP1440.1 | length 441.7
  Top Layer w10: R1640.1@3060,7270 3106.17,7270 3115.43,7260.74 v1(3115.43,7186.76) 3118.68,7190 R763.2@3170,7190 3170,7080 C828.1@3165,7080
  Bottom Layer w10: D297.3@3140,7131.5 3125,7131.5 3125,7177.19 v1(3115.43,7186.76) 3131.76,7186.76 TP1440.1@3165,7220
XSIG310089: D249.3 R1087.1 R1239.1 TP1441.1 U163.2 | length 638.6
  Top Layer w10: v1(4243.75,4914.48) 4250.52,4914.48 v1@4256.25,4908.75 ; U163.2@4261.25,4792.4 4265,4796.15 4265,4900 v1@4256.25,4908.75 ; R1239.1@4280,4960 4280,4915 4273.75,4908.75 v1@4256.25,4908.75
  Bottom Layer w10: D249.3@4150,4891.5 4220.76,4891.5 v1(4243.75,4914.48) ; TP1441.1@4270,4990 4243.75,4963.75 v1(4243.75,4914.48) ; R1087.1@4280,4690 4281.19,4690 4281.19,4720.05 4243.75,4757.49 v1(4243.75,4914.48)
XSIG310091: D289.1 Q20.1 R1279.1 TP1442.1 | length 365.1
  Top Layer w10: R1279.1@1350,270 D289.1@1422.5,270 ; D289.1@1422.5,268.5 D289.1@1422.5,270 ; v1(1544.48,275) v1@1550.98,268.5 ; Q20.1@1592.5,268.5 v1@1550.98,268.5 ; D289.1@1422.5,270 1422.5,297.91 1431.73,307.14 1530.96,307.14 1544.45,293.65 1544.45,268.5 v1@1550.98,268.5
  Bottom Layer w10: TP1442.1@1495,275 v1(1544.48,275)
XSIG310104: C827.1 D295.3 R762.2 R1638.1 TP1443.1 | length 419.6
  Top Layer w10: C827.1@3715,7080 3710,7080 R762.2@3710,7190 3741,7190 3746.97,7195.97 v1(3755.65,7195.97) 3755.65,7256.47 3769.18,7270 R1638.1@3810,7270
  Bottom Layer w10: D295.3@3740,7141.5 3740,7180.32 v1(3755.65,7195.97) 3794.03,7195.97 TP1443.1@3820,7170
XSIG310105: C830.2 R963.2 R1457.1 TP1444.1 U164.1 | length 471.5
  Top Layer w10: C830.2@3620,4545 3710,4545 R963.2@3710,4550 R1457.1@3790,4550 3790,4598.2 v1(3787.61,4600.59) 3787.61,4604.34 3774.06,4604.34 3755,4623.4 3755,4650 3742.4,4662.6 U164.1@3696.25,4662.6
  Bottom Layer w10: v1(3787.61,4600.59) 3818.2,4570 TP1444.1@3885,4570
XSIG310112: R1088.1 R1240.1 TP1445.1 U164.2 | length 356.9
  Top Layer w10: U164.2@3696.25,4737.4 3729.54,4737.4 3750.37,4758.24 v1(3750.37,4814.91)
  Bottom Layer w10: TP1445.1@3520,4815 3520,4820 R1240.1@3610,4820 R1088.1@3690,4820 3745.29,4820 v1(3750.37,4814.91)
XSIG310116: D247.1 D247.2 R1240.2 R1282.1 R2088.1 TP1446.1 | length 634
  Top Layer w15: v1(3598.4,5040.94) 3598.4,5054.05 3649.35,5105 R2088.1@3670,5105
  Bottom Layer w10: TP1446.1@3575,4990 3575,5017.54 v1(3598.4,5040.94) 3609.33,5030 R1282.1@3690,5030 ; R1240.2@3610,4900 3610,4933.97 3631.42,4955.39 3660.92,4955.39 3690,4984.47 R1282.1@3690,5030 ; D247.1@3877.5,5038.5 D247.2@3802.5,5038.5 3767.5,5038.5 3759,5030 R1282.1@3690,5030
XSIG310120: D290.3 R1088.2 TP118.1 | length 200.6
  Bottom Layer w10: R1088.2@3690,4900 3760,4900 ; TP118.1@3760,4950 3760,4900 ; D290.3@3840,4901.5 3805,4901.5 3803.5,4900 3760,4900
XSIG310121: D290.1 Q61.1 R1280.1 TP1447.1 | length 368.3
  Bottom Layer w10: Q61.1@3702.5,4701.5 3702.5,4731.13 3720.53,4749.16 TP1447.1@3755,4749.16 ; TP1447.1@3755,4765 TP1447.1@3755,4749.16 ; R1280.1@3960,4810 3922.5,4810 3914,4818.5 D290.1@3877.5,4818.5 3877.5,4774.73 3851.93,4749.16 TP1447.1@3755,4749.16
XSIG310123: Q61.3 R1403.1 TP1448.1 | length 236.7
  Bottom Layer w10: TP1448.1@3535,4695 3570,4660 R1403.1@3620,4660 3646.89,4660 3688.39,4618.5 Q61.3@3740,4618.5
XSIG310124: Q89.3 R1101.1 TP1449.1 | length 230.5
  Bottom Layer w10: TP1449.1@3535,4500 3572.5,4500 3582.5,4510 R1101.1@3620,4510 3649.75,4510 3701.25,4458.5 Q89.3@3740,4458.5
XSIG310126: Q89.1 R1402.1 R1403.2 TP1450.1 | length 566.7
  Top Layer w10: v1(3937.96,4428.24) 3937.96,4433.73 3955.48,4433.73 3974.2,4452.45 3974.2,4470 R1402.1@3980,4470
  Bottom Layer w10: TP1450.1@3530,4595 3567.5,4595 3582.5,4580 R1403.2@3620,4580 3638.54,4580 3677.04,4541.5 Q89.1@3702.5,4541.5 3702.5,4512.77 3715.27,4500 3770.92,4500 3827.44,4443.48 3915.05,4443.48 3930.29,4428.24 v1(3937.96,4428.24)
XSIG310128: D281.1 D282.1 TP1451.1 | length 335
  Bottom Layer w10: D281.1@3687.5,6018.5 3687.5,6041.25 3713.25,6067 3857.52,6067 3867.5,6057.02 D282.1@3867.5,6028.5 3874.4,6028.5 3877.9,6025 TP1451.1@3955,6025
XSIG310129: D294.1 D295.1 TP117.1 | length 266.7
  Bottom Layer w10: D294.1@3627.5,7058.5 3627.5,7028.7 3651.2,7005 3680,7005 ; TP117.1@3680,6970 3680,7005 ; D295.1@3777.5,7058.5 3777.5,7024.47 3758.03,7005 3680,7005
XSIG310130: D296.1 D297.1 TP1452.1 | length 315.1
  Bottom Layer w10: D297.1@3177.5,7048.5 3177.5,7000.52 3190.5,6987.52 3322.22,6987.52 3327.5,6992.8 3327.5,6993.71 ; D296.1@3327.5,7048.5 3327.5,6993.71 ; TP1452.1@3370,6970 3370,6972.59 3348.62,6972.59 3327.5,6993.71
XSIG310132: D252.1 D252.2 D289.3 R1087.2 TP116.1 | length 8175.3
  Top Layer w10: v1(1011.11,1574.85) 739.36,1303.09 739.36,735.29 994.65,480 1024.44,480 1096.2,408.24 1441.03,408.24 1460,389.27 D289.3@1460,351.5 ; v1(4120,3025.75) 4121.84,3025.75 4121.84,3954.31 4340.73,4173.19 4340.73,4614.04 v1(4329,4614.04)
  Bottom Layer w10: v1(1011.11,1574.85) 1022.09,1574.85 1055.97,1540.97 TP116.1@1060,1545 1070,1535 1070,1533.44 1398.56,1533.44 1440.18,1575.05 1542.07,1575.05 1606.47,1639.46 1606.47,1858.9 1663.77,1916.2 1992.7,1916.2 1993.62,1917.12 2354.63,1917.12 2454.37,2016.86 2482.99,2016.86 2626.32,2160.18 2626.32,2461.57 2749.04,2584.29 2749.04,2939.7 2849.84,3040.5 3167.6,3040.5 3218.21,2989.89 4084.14,2989.89 v1(4120,3025.75) ; R1087.2@4280,4610 4324.96,4610 v1(4329,4614.04) 4329,4710.12 4292.5,4746.62 D252.2@4292.5,4798.5 D252.1@4367.5,4798.5
XSIG310134: R1404.1 R1405.2 TP1453.1 | length 203.4
  Top Layer w10: R1404.1@240,7690 R1405.2@320,7690 320,7699.14 354.29,7733.44 v1(354.29,7734.1)
  Bottom Layer w10: TP1453.1@305,7700 315.65,7700 351.78,7736.13 353.8,7734.1 v1(354.29,7734.1)
XSIG310135: C826.2 D281.3 R860.2 R1644.1 TP1454.1 | length 543.6
  Top Layer w10: R1644.1@3600,6120 C826.2@3685,6120 ; C826.2@3685,6090 C826.2@3685,6120 ; R860.2@3810,6230 3810,6200.15 3775.04,6165.19 v1(3687.33,6165.19) 3687.33,6157.33 3685,6155 C826.2@3685,6120
  Bottom Layer w10: TP1454.1@3535,6050 3536.99,6050 3588.49,6101.5 D281.3@3650,6101.5 3650,6105 3680.61,6135.61 3680.61,6158.47 v1(3687.33,6165.19)
XSIG310142: C828.2 D296.3 R854.2 R1641.1 TP1455.1 | length 458.5
  Top Layer w10: C828.2@3275,7080 3270,7080 R854.2@3270,7190 3303.18,7190 v1@3313.18,7200 ; v1(3323.13,7190.04) v1@3313.18,7200 ; R1641.1@3390,7270 3330.81,7270 3311.39,7250.58 3311.39,7201.79 v1@3313.18,7200
  Bottom Layer w10: TP1455.1@3250,7220 3255.52,7220 3285.48,7190.04 3290,7190.04 ; D296.3@3290,7131.5 3290,7190.04 ; v1(3323.13,7190.04) 3290,7190.04
XSIG310150: R1077.1 R1719.2 TP1456.1 U233.1 | length 478.6
  Top Layer w10: R1077.1@2610,6460 2647.5,6460 2661.1,6473.6 2668.02,6473.6 v1(2669.26,6474.85) 2674.23,6474.85 2692.25,6492.86 2819.63,6492.86 2835,6508.23 U233.1@2835,6590 2835,6680 R1719.2@2830,6680
  Bottom Layer w10: TP1456.1@2620,6460 2656.9,6460 2669.26,6472.36 v1(2669.26,6474.85)
XSIG310151: R1406.1 R1825.2 TP1457.1 U233.7 | length 354.4
  Top Layer w10: v1(2660.62,6322.43) 2686.95,6322.43 2700,6309.38 R1825.2@2700,6280 R1406.1@2780,6280 2785,6280 U233.7@2785,6390
  Bottom Layer w10: TP1457.1@2595,6275 2642.43,6322.43 v1(2660.62,6322.43)
XSIG310153: R1719.1 R2289.2 TP1458.1 U233.2 | length 588.4
  Top Layer w10: R2289.2@2610,6760 2610,6784.27 2620.73,6795 2777.93,6795 2782.32,6790.61 2782.32,6760 ; v1(2785,6527.82) U233.2@2785,6590 2782.21,6590 2782.21,6760 2782.32,6760 ; R1719.1@2830,6760 2782.32,6760
  Bottom Layer w10: v1(2785,6527.82) TP1458.1@2785,6600
XSIG310154: C512.1 R1077.2 TP1459.1 U233.6 | length 365.5
  Top Layer w10: C512.1@2530,6380 R1077.2@2610,6380 2638.87,6380 2658.5,6399.63 2658.5,6436.86 2666.14,6444.5 2706.17,6444.5 v1(2706.17,6453.31) 2721.69,6453.31 2735,6440 U233.6@2735,6390
  Bottom Layer w10: v1(2706.17,6453.31) 2706.69,6453.31 TP1459.1@2740,6420
XSIG310158: C783.1 R1459.2 R1608.1 TP1460.1 U233.5 | length 451.7
  Top Layer w10: R1459.2@2460,6280 2465,6275 C783.1@2530,6275 ; v1(2530,6328.13) C783.1@2530,6275 ; U233.5@2685,6390 2685,6365.2 2672.66,6352.86 2648.62,6352.86 2614.25,6318.49 2614.25,6280 R1608.1@2610,6280 2610,6275 C783.1@2530,6275
  Bottom Layer w10: TP1460.1@2470,6275 2470,6278.23 2480.1,6278.23 v1(2530,6328.13)
XSIG310159: C783.2 R1608.2 R1825.1 TP1461.1 | length 342.7
  Top Layer w10: C783.2@2530,6205 2610,6205 R1608.2@2610,6200 2647.5,6200 2654.25,6206.75 2655.75,6206.75 ; v1(2655.75,6241.03) 2655.75,6206.75 ; R1825.1@2700,6200 2662.5,6200 2655.75,6206.75
  Bottom Layer w10: TP1461.1@2560,6195 2631.99,6195 2655.75,6218.77 v1(2655.75,6241.03)
XSIG310161: D194.3 R1406.2 TP1462.1 | length 337.3
  Top Layer w10: R1406.2@2780,6200 2801.95,6200 2824.99,6223.04 v1(2824.99,6318.54)
  Bottom Layer w10: D194.3@2750,6301.5 2807.95,6301.5 v1(2824.99,6318.54) 2869.74,6363.29 2869.74,6405 TP1462.1@2870,6405
XSIG310165: C357.2 D194.2 Q19.1 R1356.1 R1460.2 TP1463.1 | length 957
  Top Layer w10: R1356.1@2220,6280 R1460.2@2310,6280 C357.2@2390,6280 v1(2390,6326.29)
  Bottom Layer w10: Q19.1@2212.5,6311.5 2212.5,6273.45 2218.81,6267.14 2339.03,6267.14 TP1463.1@2375.58,6230.58 ; TP1463.1@2375,6230 TP1463.1@2375.58,6230.58 ; v1(2390,6326.29) 2390,6245 TP1463.1@2376.74,6231.74 ; D194.2@2712.5,6218.5 2712.5,6172.69 2696.48,6156.67 2497.91,6156.67 2425.43,6229.15 2379.32,6229.15 TP1463.1@2376.74,6231.74 ; TP1463.1@2375.58,6230.58 TP1463.1@2376.74,6231.74
XSIG310169: R1743.1 TP1464.1 U233.3 | length 211.8
  Top Layer w10: v1(2658.87,6670) 2700,6670 R1743.1@2710,6680 2710,6651.68 2735,6626.68 U233.3@2735,6590
  Bottom Layer w10: v1(2658.87,6670) TP1464.1@2715,6670
XSIG310171: D235.1 D235.2 R1239.2 R2089.1 TP1465.1 | length 456.5
  Top Layer w10: R2089.1@4150,4995 4150,5001.97 4217.19,5001.97 4234.49,5019.27 4234.49,5040 ; v1(4234.49,5091.64) 4234.49,5040 ; R1239.2@4280,5040 4234.49,5040
  Bottom Layer w10: D235.2@4112.5,5048.5 D235.1@4187.5,5048.5 4214.84,5048.5 4234.49,5068.15 v1(4234.49,5091.64) 4236.64,5091.64 4236.64,5121.64 TP1465.1@4275,5160
XSIG310174: C829.2 Q89.2 R962.2 R1402.2 R1456.1 TP110.1 U163.1 | length 693.8
  Top Layer w10: v1(3930.54,4549.18) 3931.36,4550 R1402.2@3980,4550 R1456.1@4060,4550 R962.2@4150,4550 C829.2@4230,4550 ; C829.2@4230,4545 C829.2@4230,4550 ; U163.1@4261.25,4717.6 4265,4713.85 4265,4610.5 4230,4575.5 C829.2@4230,4550
  Bottom Layer w10: Q89.2@3777.5,4541.5 3812.5,4541.5 3865,4489 TP110.1@3865,4485 3907.97,4527.97 3909.33,4527.97 v1(3930.54,4549.18)
XSIG310189: Q192.1 R2588.1 R2612.1 | length 274.8
  Bottom Layer w10: Q192.1@4782.5,3331.5 4782.5,3356.7 4795.8,3370 4884,3370 4914,3340 R2588.1@4930,3340 4962.5,3340 4972.5,3350 R2612.1@5010,3350
XSIG310192: Q180.1 R2574.2 R2621.2 TP1834.1 | length 287.7
  Bottom Layer w10: R2574.2@4560,3390 R2621.2@4560,3330 4632.5,3330 Q180.1@4632.5,3321.5 4655.56,3321.5 4664.68,3330.62 4664.68,3353.67 4680,3368.99 TP1834.1@4680,3435
XSIG310198: Q181.1 R2575.2 R2622.2 TP1833.1 | length 338.3
  Bottom Layer w10: TP1833.1@3720,6250 3720,6336 Q181.1@3707.5,6348.5 3707.5,6349.95 3760.05,6349.95 3810,6300 R2622.2@3810,6270 R2575.2@3890,6270
XSIG310205: Q208.1 R2584.1 R2614.1 TP1832.1 | length 279.2
  Bottom Layer w10: R2614.1@3180,6230 3182.5,6232.5 Q208.1@3182.5,6298.5 3225.48,6298.5 3250,6323.02 TP1832.1@3250,6370 ; R2584.1@3250,6445 TP1832.1@3250,6370 ; TP1832.1@3260,6370 TP1832.1@3250,6370
XSIG310208: Q182.1 R2576.2 R2623.2 TP1830.1 | length 304.6
  Bottom Layer w10: TP1830.1@2875,6265 2888.5,6251.5 3019.25,6251.5 3020,6250.75 ; Q182.1@3032.5,6298.5 3020,6286 3020,6250.75 ; R2623.2@3080,6210 R2576.2@3020,6210 3020,6250.75
XSIG310215: Q194.1 R2590.1 R2613.1 TP1831.1 | length 295.6
  Bottom Layer w10: Q194.1@3907.5,6348.5 3937.47,6348.5 ; TP1831.1@3935,6500 3937.47,6497.53 3937.47,6348.5 ; R2613.1@3980,6280 R2590.1@3980,6350 3949,6350 3947.5,6348.5 3937.47,6348.5
XSIG320004: C445.2 C479.2 Q55.1 R644.2 R936.2 TP1466.1 | length 486.4
  Top Layer w10: R936.2@8630,2740 8630,2809 8640,2819 C445.2@8640,2850 C479.2@8640,2950 R644.2@8640,3050 8640,3090.55 v1(8625,3105.55) 8625,3112.5 8632.5,3120 Q55.1@8632.5,3158.5
  Bottom Layer w10: v1(8625,3105.55) TP1466.1@8625,3160
XSIG320010: C446.2 C480.2 Q49.1 R645.2 R937.2 TP1467.1 | length 476.3
  Top Layer w10: R937.2@8930,2740 8930,2809 8940,2819 C446.2@8940,2850 C480.2@8940,2950 R645.2@8940,3050 8940,3100.55 v1(8935,3105.55) 8935,3117.5 8932.5,3120 Q49.1@8932.5,3158.5
  Bottom Layer w10: TP1467.1@8935,3055 v1(8935,3105.55)
XSIG320016: C447.2 C481.2 Q52.1 R646.2 R938.2 TP1468.1 | length 478.3
  Top Layer w10: R938.2@9230,2740 9230,2809 9240,2819 C481.2@9240,2850 C447.2@9240,2950 v1@9240,2997.52 ; Q52.1@9232.5,3158.5 9232.5,3120 9240,3112.5 R646.2@9240,3050 v1@9240,2997.52 ; v1(9235,2997.52) v1@9240,2997.52
  Bottom Layer w10: TP1468.1@9235,2950 v1(9235,2997.52)
XSIG320022: C448.2 C482.2 Q56.1 R647.2 R939.2 TP1469.1 | length 483.1
  Top Layer w10: R939.2@9530,2740 9530,2809 9540,2819 C482.2@9540,2850 C448.2@9540,2950 v1(9540,2992.6) R647.2@9540,3050 9540,3112.5 9532.5,3120 Q56.1@9532.5,3158.5
  Bottom Layer w10: v1(9540,2992.6) TP1469.1@9540,3050
XSIG320027: C449.2 C483.2 Q50.1 R648.2 R940.2 TP1470.1 | length 480.5
  Top Layer w10: R940.2@9080,2740 9080,2809 9090,2819 C449.2@9090,2850 C483.2@9090,2950 R648.2@9090,3050 v1(9090,3100.64) 9090,3112.5 9082.5,3120 Q50.1@9082.5,3158.5
  Bottom Layer w10: TP1470.1@9080,3050 9080,3085 9090,3095 v1(9090,3100.64)
XSIG320033: C450.2 C484.2 Q51.1 R649.2 R941.2 TP1471.1 | length 513.1
  Top Layer w10: v1(8769.89,2997.52) v1@8782.93,2997.52 ; R941.2@8780,2740 8780,2809 8790,2819 C450.2@8790,2850 C484.2@8790,2950 8790,2990.44 v1@8782.93,2997.52 ; Q51.1@8782.5,3158.5 8782.5,3120 8790,3112.5 R649.2@8790,3050 8790,3004.59 v1@8782.93,2997.52
  Bottom Layer w10: v1(8769.89,2997.52) 8782.93,2997.52 8790,2990.44 8790,2955 TP1471.1@8800,2955
XSIG320041: C451.2 C485.2 Q62.1 R650.2 R942.2 TP1472.1 | length 615.5
  Top Layer w10: R650.2@1740,2960 1732.5,2960 Q62.1@1732.5,3068.5 1732.5,3090.38 1749.12,3107 1883.91,3107 1890,3100.91 ; v1(1853.98,3023.98) 1871,3023.98 1871,3022.01 ; R942.2@1870,2950 1871,2950 1871,3009.71 1871,3022.01 ; C451.2@1890,3160 1890,3100.91 ; 1871,3022.01 1890,3041.01 C485.2@1890,3060 1890,3100.91
  Bottom Layer w10: TP1472.1@1830,3085 1833.24,3085 1853.98,3064.26 v1(1853.98,3023.98)
XSIG320047: C452.2 C486.2 Q74.1 R651.2 R943.2 TP1473.1 | length 591.4
  Top Layer w10: R651.2@2380,2950 2380,3022.5 2372.5,3030 Q74.1@2372.5,3068.5 2372.5,3089.34 2393.16,3110 2539.11,3110 v1@2540,3110.89 ; R943.2@2530,2950 2530,3019 2540,3029 C486.2@2540,3060 v1@2540,3110.89 ; C452.2@2540,3160 v1(2540,3115.72) v1@2540,3110.89
  Bottom Layer w10: TP1473.1@2530,3170 2530,3125.72 v1(2540,3115.72)
XSIG320054: C453.2 C487.2 Q73.1 R638.2 R944.2 TP1474.1 | length 510.7
  Top Layer w10: R944.2@2370,2180 2370,2249 2380,2259 C487.2@2380,2290 2380,2340 ; Q73.1@2372.5,2598.5 2372.5,2560 2380,2552.5 R638.2@2380,2490 C453.2@2380,2390 2380,2340 ; v1(2400,2340) 2380,2340
  Bottom Layer w10: v1(2400,2340) 2400,2395 TP1474.1@2410,2395
XSIG320061: C454.2 C488.2 Q75.1 R652.2 R945.2 TP1475.1 | length 479.2
  Top Layer w10: R945.2@2530,2180 2530,2249 2540,2259 C488.2@2540,2290 C454.2@2540,2390 R652.2@2540,2490 v1(2540,2545.73) 2540,2552.5 2532.5,2560 Q75.1@2532.5,2598.5
  Bottom Layer w10: TP1475.1@2530,2595 2530,2555.73 v1(2540,2545.73)
XSIG320067: C455.2 C489.2 Q34.1 R653.2 R946.2 TP1476.1 | length 449.4
  Top Layer w10: Q34.1@2032.5,2598.5 2025.47,2591.47 2025.47,2559.28 v1@2040,2544.75 ; R946.2@2040,2180 C489.2@2040,2290 C455.2@2040,2390 R653.2@2040,2490 v1@2040,2540 ; v1@2040,2540 v1(2030,2540) 2030.92,2540.02 2035.27,2540.02 v1@2040,2544.75 ; v1@2040,2540.02 v1@2040,2544.75
XSIG320074: C456.2 C490.2 Q76.1 R654.2 R947.2 TP1477.1 | length 483
  Top Layer w10: R947.2@1690,2180 1690,2249 1700,2259 C490.2@1700,2290 C456.2@1700,2390 R654.2@1700,2490 v1(1700,2549.01) 1700,2552.5 1692.5,2560 Q76.1@1692.5,2598.5
  Bottom Layer w10: TP1477.1@1685,2600 1685,2564.01 v1(1700,2549.01)
XSIG320080: C856.2 C857.2 Q102.1 R1968.2 R1981.2 TP1478.1 | length 753.6
  Top Layer w10: R1968.2@1390,2970 1390,3032.5 1382.5,3040 Q102.1@1382.5,3078.5 1382.5,3109.07 1396.43,3123 1456.88,3123 1557.98,3224.09 1620.78,3224.09 1640,3204.87 C856.2@1640,3180 C857.2@1640,3080 1640,3039.6 1650,3029.6 v1@1650,3028.97 ; v1(1642.95,3028.97) v1@1650,3028.97 ; R1981.2@1650,2970 v1@1650,3028.97
  Bottom Layer w10: TP1478.1@1635,2980 1635,3021.02 v1(1642.95,3028.97)
XSIG320087: C848.2 C849.2 Q103.1 R1964.2 R1982.2 TP1479.1 | length 595.5
  Top Layer w10: Q103.1@2042.5,3068.5 2042.5,3030 2050,3022.5 v1@2050,3017.84 ; v1(2044.98,3017.84) v1@2050,3017.84 ; C848.2@2210,3170 C849.2@2210,3070 2210,3039 2200,3029 R1982.2@2200,2960 2200,2933.07 2182.93,2916 2071.38,2916 2050,2937.38 R1964.2@2050,2960 v1@2050,3017.84
  Bottom Layer w10: v1(2044.98,3017.84) 2050,3022.86 TP1479.1@2050,3065
XSIG320093: C852.2 C853.2 Q95.1 R1966.2 R1977.2 TP1480.1 | length 507.6
  Top Layer w10: v1(1847.89,2339.32) 1854.3,2339.32 1870,2355.02 ; R1977.2@1860,2180 1860,2249 1870,2259 C853.2@1870,2290 1870,2355.02 ; Q95.1@1862.5,2598.5 1862.5,2543.56 1870,2536.06 R1966.2@1870,2490 C852.2@1870,2390 1870,2355.02
  Bottom Layer w10: v1(1847.89,2339.32) 1880.47,2306.74 1880.47,2300 TP1480.1@1880,2300
XSIG320099: C850.2 C851.2 Q101.1 R1965.2 R1972.2 TP1481.1 | length 567.3
  Top Layer w10: Q101.1@2202.5,2598.5 2210,2591 R1965.2@2210,2490 C850.2@2210,2390 C851.2@2210,2290 2210,2259 2200,2249 R1972.2@2200,2180 2200,2150.85 2213.84,2137.01 2213.84,2132.21 v1(2217.26,2132.21)
  Bottom Layer w10: v1(2217.26,2132.21) 2217.26,2179.84 2227.42,2190 TP1481.1@2250,2190
XSIG320106: C858.2 C859.2 Q98.1 R1969.2 R1971.2 TP1482.1 | length 487.3
  Top Layer w10: R1971.2@1350,2180 v1(1350,2235.69) 1350,2249 1360,2259 C859.2@1360,2290 C858.2@1360,2390 R1969.2@1360,2490 1364.77,2490 1364.77,2547.73 1352.5,2560 Q98.1@1352.5,2598.5
  Bottom Layer w10: TP1482.1@1340,2185 1340,2225.69 v1(1350,2235.69)
XSIG320112: C854.2 C855.2 Q99.1 R1967.2 R1970.2 TP1483.1 | length 492.5
  Top Layer w10: R1970.2@1520,2180 1520,2249 1530,2259 C855.2@1530,2290 C854.2@1530,2390 R1967.2@1530,2490 1530,2531.8 v1(1527.54,2534.26) 1527.54,2554.96 1522.5,2560 Q99.1@1522.5,2598.5
  Bottom Layer w10: TP1483.1@1505,2585 1505,2545.32 1516.05,2534.26 v1(1527.54,2534.26)
XSIG320119: C836.2 C837.2 Q100.1 R1958.2 R1973.2 TP1484.1 | length 500.2
  Top Layer w10: R1973.2@9980,2740 9980,2809 9990,2819 C836.2@9990,2850 C837.2@9990,2950 R1958.2@9990,3050 9990,3081.78 9969.1,3102.68 v1(9969.1,3103.3) 9969.1,3106.6 9982.5,3120 Q100.1@9982.5,3158.5
  Bottom Layer w10: v1(9969.1,3103.3) 9962.8,3109.6 9962.8,3119.6 9968.21,3125 9968.21,3160 TP1484.1@9970,3160
XSIG320125: C842.2 C843.2 Q107.1 R1961.2 R1978.2 TP1485.1 | length 482.3
  Top Layer w10: R1978.2@9680,2740 9680,2809 9690,2819 C842.2@9690,2850 C843.2@9690,2950 R1961.2@9690,3050 9690,3094.61 v1(9684.99,3099.62) 9684.99,3117.51 9682.5,3120 Q107.1@9682.5,3158.5
  Bottom Layer w10: TP1485.1@9670,3150 9670,3114.61 v1(9684.99,3099.62)
XSIG320131: C832.2 C833.2 Q96.1 R1956.2 R1979.2 TP1486.1 | length 482.3
  Top Layer w10: R1979.2@8480,2740 8480,2809 8490,2819 C832.2@8490,2850 C833.2@8490,2950 R1956.2@8490,3050 v1(8490,3104.71) 8490,3112.5 8482.5,3120 Q96.1@8482.5,3158.5
  Bottom Layer w10: TP1486.1@8475,3155 8475,3119.71 v1(8490,3104.71)
XSIG320137: C838.2 C839.2 Q106.1 R1959.2 R1974.2 TP1487.1 | length 485.4
  Top Layer w10: R1974.2@10130,2740 v1(10130,2793.61) 10130,2809 10140,2819 C839.2@10140,2850 C838.2@10140,2950 R1959.2@10140,3050 10140,3112.5 10132.5,3120 Q106.1@10132.5,3158.5
  Bottom Layer w10: v1(10130,2793.61) 10130,2815.5 10150,2835.5 TP1487.1@10150,2845
XSIG320142: C840.2 C841.2 Q108.1 R1960.2 R1983.2 TP1488.1 | length 481.4
  Top Layer w10: R1983.2@9830,2740 9830,2809 9840,2819 C840.2@9840,2850 C841.2@9840,2950 R1960.2@9840,3050 9840,3096.46 v1(9830,3106.46) 9830,3117.5 9832.5,3120 Q108.1@9832.5,3158.5
  Bottom Layer w10: v1(9830,3106.46) TP1488.1@9830,3160
XSIG320148: C834.2 C835.2 Q97.1 R1957.2 R1980.2 TP1489.1 | length 480.3
  Top Layer w10: R1980.2@9380,2740 9380,2809 9390,2819 C835.2@9390,2850 C834.2@9390,2950 R1957.2@9390,3050 v1(9390,3103.98) 9390,3112.5 9382.5,3120 Q97.1@9382.5,3158.5
  Bottom Layer w10: TP1489.1@9375,3150 9378.98,3150 9378.98,3115 v1(9390,3103.98)
XSIG320159: D312.2 R2026.1 TP1490.1 | length 344.5
  Top Layer w10: R2026.1@1050,590 1031.75,590 1015.59,606.15 1015.59,668.15 1057.5,710.05 D312.2@1057.5,728.5 1058.83,728.5 1058.83,766.58 v1(1077.03,784.78)
  Bottom Layer w10: TP1490.1@995,745 1021.78,745 1061.56,784.78 v1(1077.03,784.78)
XSIG320162: D313.2 R2027.1 TP1491.1 | length 196
  Top Layer w10: D313.2@8477.5,198.5 8477.5,195.15 8511.2,195.15 8531.05,215 v1(8532.13,215) 8545.65,215 8560,200.65 R2027.1@8560,170
  Bottom Layer w10: v1(8532.13,215) 8532.13,167.87 TP1491.1@8545,155
XSIG320166: C897.1 Q110.1 R2027.2 R2038.1 TP1492.1 | length 631.9
  Top Layer w10: R2027.2@8620,170 C897.1@8700,170 R2038.1@8700,250 8700,288.82 8713.51,302.33 8812.57,302.33 8831.5,283.4 8831.5,237.17 v1(8833.79,237.17)
  Bottom Layer w10: TP1492.1@8700,235 8823.74,235 8826.39,237.65 v1@8833.79,237.65 ; v1(8833.79,237.17) v1@8833.79,237.65 ; Q110.1@8897.5,288.5 8897.5,255.15 8880,237.65 v1@8833.79,237.65
XSIG320173: C896.1 Q111.1 R2026.2 R2037.1 TP1493.1 | length 411
  Top Layer w10: R2026.2@1050,650 v1@1100.97,650 ; v1(1100.97,654.46) v1@1100.97,650 ; Q111.1@1142.5,718.5 1150,711 C896.1@1150,650 ; R2037.1@1250,650 C896.1@1150,650 ; v1@1100.97,650 C896.1@1150,650
  Bottom Layer w10: v1(1100.97,654.46) 1151.5,705 TP1493.1@1215,705
XSIG330005: Q9.1 R1093.2 R1290.1 TP1494.1 | length 551.3
  Top Layer w10: v1(3698.41,4320.11) 3698.41,4354.03 3707.33,4362.95 3870,4362.95 ; R1093.2@3870,4470 3870,4362.95 ; R1290.1@3930,4270 3930,4302.31 3870,4362.31 3870,4362.95
  Bottom Layer w10: Q9.1@3702.5,4271.5 3702.5,4310 3698.41,4314.09 v1(3698.41,4320.11) 3712.61,4320.11 3712.75,4320.25 3725.25,4320.25 3750,4345 TP1494.1@3750,4340